# EAGLE board Schnitzelbub Panel TINRS - Edgecutter (EAGLE 9.2.2)
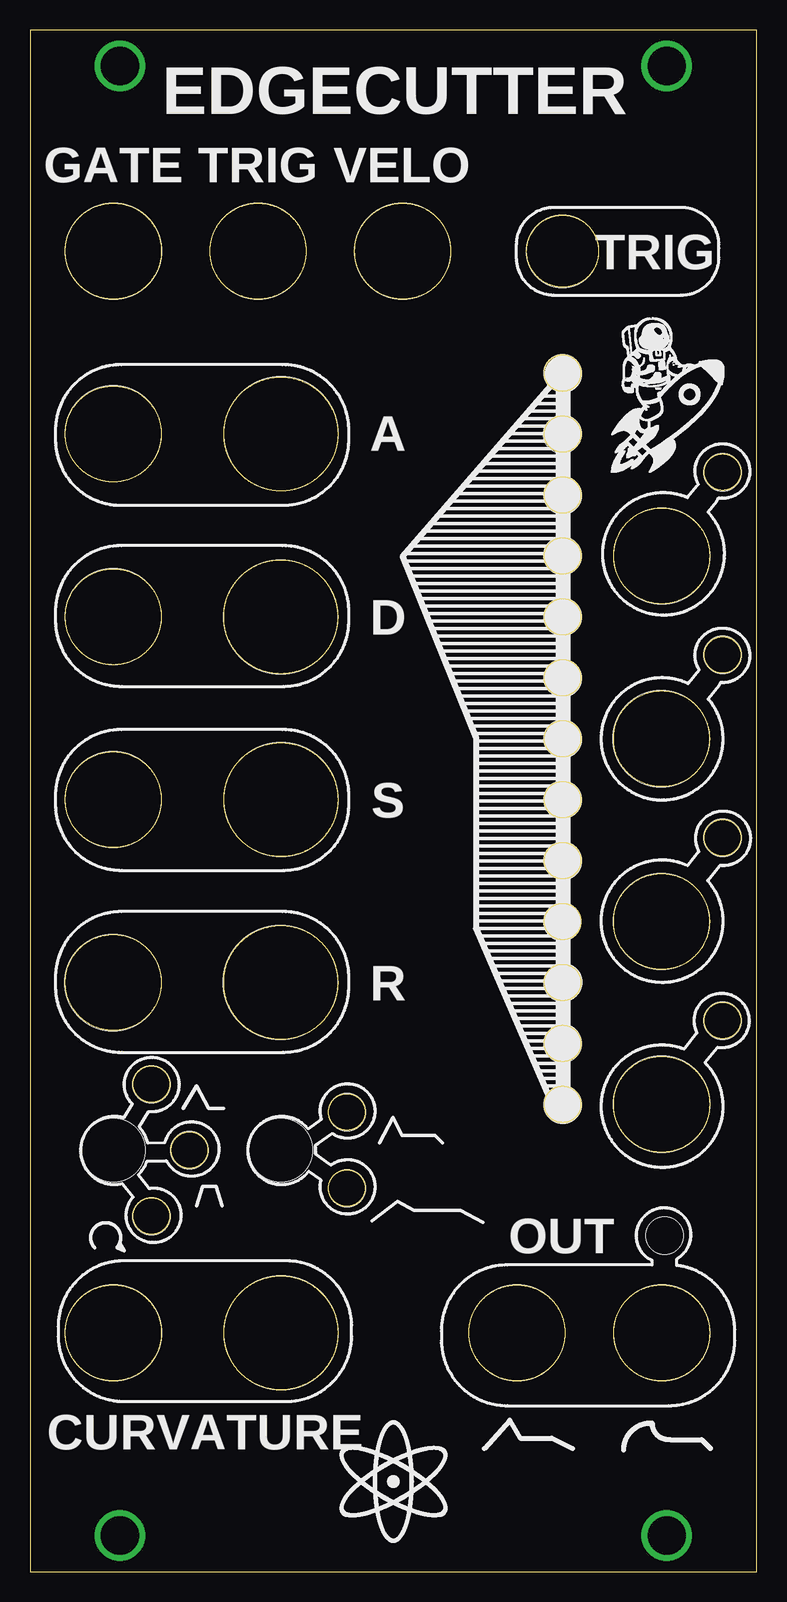
[diagram p0: board, top side]
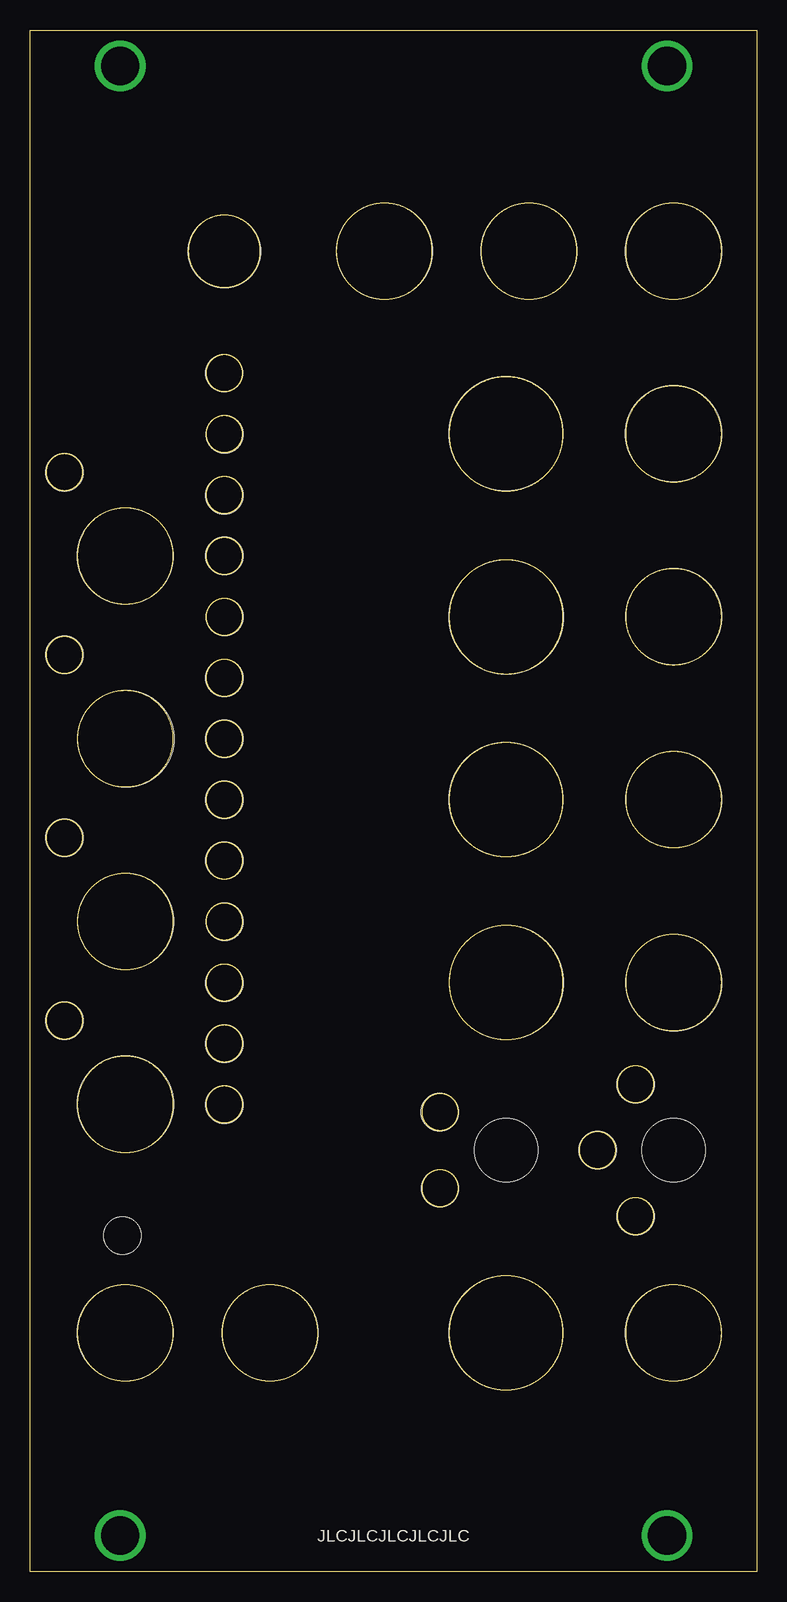
[diagram p1: board, bottom side, seen from below]

Size 60.62 x 128.5 mm. Coordinates in mm from the lower left corner, seen from the top.
Copper layers (1*16): Top 0.035mm / dielectric 1.5mm / Bottom 0.035mm
Design rules "default": minimum track width 6mil, minimum drill 0.35mm, track to track 6mil, track to pad 6mil, pad to pad 6mil, via to via 6mil, smd to smd 6mil, copper to edge 40mil, drill to drill 6mil, minimum pad ring 10mil, minimum via ring 8mil, stop-mask expansion 4mil, vias tented up to drill 0mil, thermal gap 10mil
Holes 3.1 mm at 52.91,27.99
Holes 5.3 mm at 6.95,35.13 20.92,35.13

## Footprints (pad centres in the part's own frame; a part is rotated, then mirrored left to right if it is on the bottom)
SILKEDGE = hole 8: 9.677,20.218; 43.307,20.218; 55.397,20.218; 9.634,49.393; 9.642,64.671; 9.649,79.909; 9.657,95.159; 9.665,110.37; 21.737,110.377; 33.773,110.385; 55.399,84.967; 55.339,69.741; 55.356,54.503; 55.372,39.279 | hole 9.5: 23.647,20.218; 23.59,49.418; 23.653,64.671; 23.615,79.884; 23.643,95.159 | hole 3.1: 12.827,29.921; 16.007,35.43; 12.834,40.918; 29.145,32.252; 29.152,38.606; 47.135,39.241; 47.125,44.31; 47.115,49.383; 47.105,54.485; 47.121,59.591; 47.111,64.65; 47.126,69.738; 47.116,74.795; 60.466,46.23; 60.451,61.469; 60.471,76.72; 60.466,91.957; 47.106,79.881; 47.122,84.996; 47.112,90.039; 47.102,95.111; 47.142,100.213 | hole 6: 47.117,110.365

## Placement (x,y rotation side)
E$1  [SILKEDGE]  -2.71,-0.32 0 top
E$2  [ATOMIUM]  30.3,7.5 0 top
E$3  [ROCKETSCIENCE]  53.3,98 0 top

## Library data of the parts
E$1-E$3 = RocketScienceLogos

## Tracks (layer width: path | path; a pad name or v marks a point on that pad's centre or on a via)
S$1  (via drill 3.2)
  other vias: 7.5,3
S$2  (via drill 3.2)
  other vias: 53.1,3
S$3  (via drill 3.2)
  other vias: 7.5,125.5
S$4  (via drill 3.2)
  other vias: 53.1,125.5
S$5
  Top 0.254: 7,22 8,22
S$6
  Bottom 0.254: 7,23 8,23

## Text on the board
tPlace: EDGECUTTER | GATE | TRIG | VELO | TRIG | A | D | S | R | OUT | CURVATURE
bPlace: JLCJLCJLCJLCJLC